# EAGLE board RaspPi_PCB (EAGLE 7.6.0)
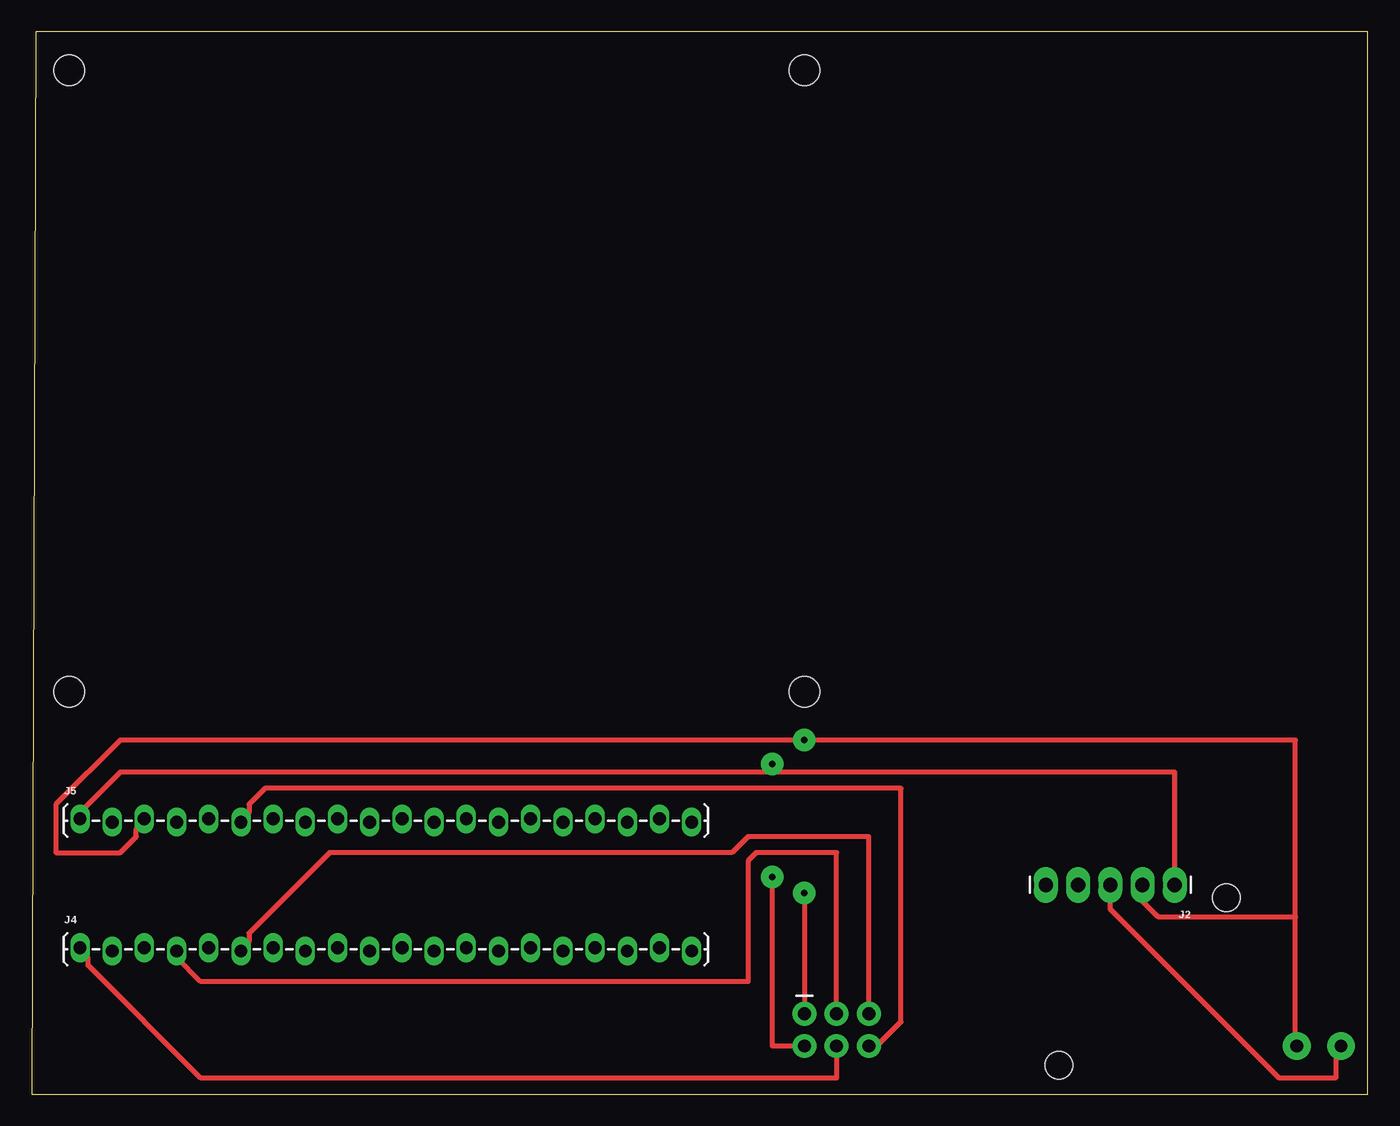
[diagram p0: board, top side]
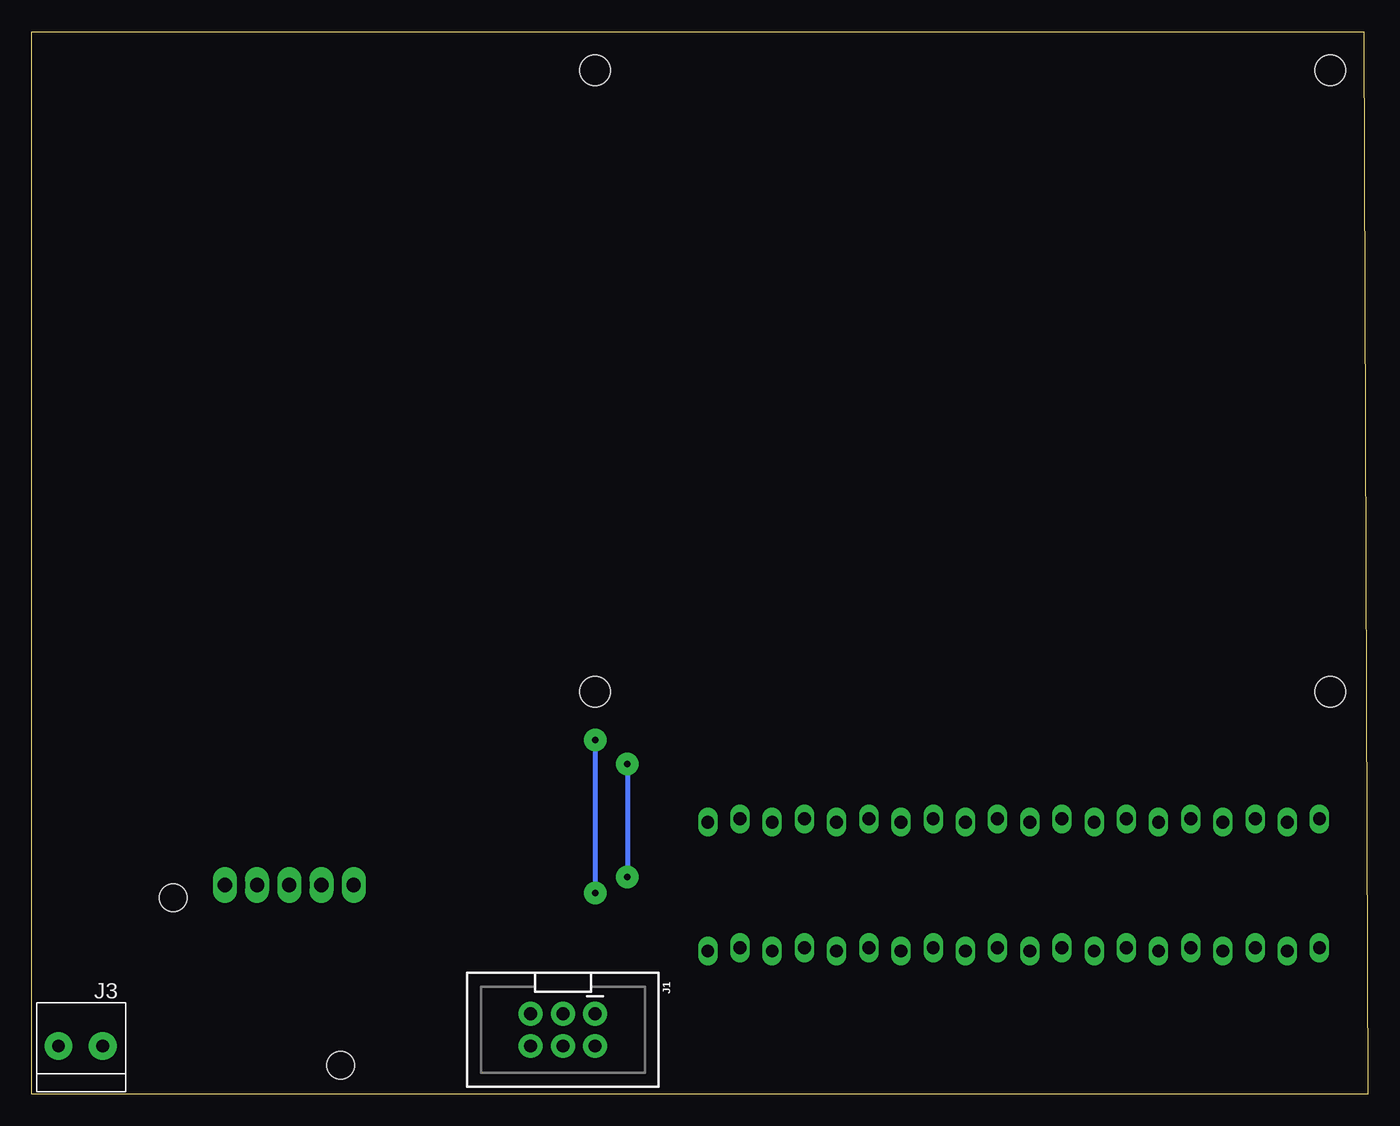
[diagram p1: board, bottom side, seen from below]

Size 105.41 x 83.8 mm. Coordinates in mm from the lower left corner, seen from the top.
Outline: 105.41,83.8 0.33,83.8 0,0 105.41,0 105.41,83.8
Copper layers (1*16): Top 0.035mm / dielectric 1.5mm / Bottom 0.035mm
Design rules "OthermillDRC_1_64_v2 *": minimum track width 16mil, minimum drill 20mil, track to track 32mil, track to pad 32mil, pad to pad 32mil, via to via 32mil, smd to smd 0mil, copper to edge 0mil, drill to drill 1mil, minimum pad ring 0mil, minimum via ring 25mil, stop-mask expansion 1mil, vias tented up to drill 30mil, thermal gap 10mil
Holes 2.44 mm at 60.96,31.75 60.96,80.75 2.96,80.75 2.96,31.75
Holes 2.18 mm at 94.23,15.49 81.03,2.29
bRestrict: area 99.1,2.5 to 104.1,5.1; area 59.7,2.5 to 67.3,7.6; area 2.5,10.2 to 53.3,12.7; area 2.5,20.3 to 53.3,22.9; area 78.7,15.2 to 91.4,17.8
vRestrict: area 55.9,0 to 72.4,10.2

## Footprints (pad centres in the part's own frame; a part is rotated, then mirrored left to right if it is on the bottom)
2X3-SHROUDED = drill 1.016 pad 1.88: 1 -1.27,2.54; 2 1.27,2.54; 3 -1.27,0; 4 1.27,0; 5 -1.27,-2.54; 6 1.27,-2.54
1X05_LONGPADS = drill 1.118 pad 1.88 long: 1 0,0; 2 2.54,0; 3 5.08,0; 4 7.62,0; 5 10.16,0
1X2-3.5MM = drill 1 pad 2.184: 1 1.8,0; 2 -1.7,0
1X20_LOCK_LONGPADS = drill 1.016 long: 1 0,0.127; 2 2.54,-0.127; 3 5.08,0.127; 4 7.62,-0.127; 5 10.16,0.127; 6 12.7,-0.127; 7 15.24,0.127; 8 17.78,-0.127; 9 20.32,0.127; 10 22.86,-0.127; 11 25.4,0.127; 12 27.94,-0.127; 13 30.48,0.127; 14 33.02,-0.127; 15 35.56,0.127; 16 38.1,-0.127; 17 40.64,0.127; 18 43.18,-0.127; 19 45.72,0.127; 20 48.26,-0.127

## Placement (x,y rotation side)
J1  [2X3-SHROUDED]  63.5,5.08 270 bottom
J2  [1X05_LONGPADS]  90.17,16.51 180 top
J3  1X2-3.5MM  [1X2-3.5MM]  101.6,3.81 0 bottom
J4  [1X20_LOCK_LONGPADS]  3.81,11.43 0 top
J5  [1X20_LOCK_LONGPADS]  3.81,21.59 0 top

## Library data of the parts
J1 = SparkFun-Connectors; PROD_ID: CONN-10681; SF_ID: PRT_10877
J2 J4 J5 = SparkFun-Connectors
J3 = adafruit

## Nets
3.3V: J1.4 J4.1
5V: J1.2 J2.1 J5.1
GND: J1.1 J2.2 J3.1 J5.3
PIN4: J1.3 J4.4
PIN17: J1.5 J4.6
PIN18: J1.6 J5.6
VIN: J2.3 J3.2

## Tracks (layer width: path | path; a pad name or v marks a point on that pad's centre or on a via)
3.3V
  Top 0.406: J1.4 63.5,1.27 13.34,1.27 4.45,10.16 4.45,10.79 3.81,11.43 J4.1
5V  (via drill 0.51)
  Top 0.406: 58.42,25.4 90.17,25.4 J2.1 | 58.42,25.4 6.99,25.4 3.81,22.23 J5.1 | J1.2 58.42,3.81 v58.42,17.14 | 58.42,25.4 v58.42,26.04
  Bottom 0.406: v58.42,26.04 v58.42,17.14
GND  (via drill 0.51)
  Top 0.406: 99.69,13.97 99.69,3.81 J3.1 | 99.69,13.97 99.69,27.94 v60.96,27.94 6.99,27.94 1.91,22.86 1.91,19.05 6.99,19.05 8.26,20.32 8.26,20.95 8.89,21.59 J5.3 | v60.96,15.88 J1.1 | J2.2 87.63,15.24 88.9,13.97 99.69,13.97
  Bottom 0.406: v60.96,27.94 v60.96,15.88
PIN4
  Top 0.406: J1.3 63.5,19.05 57.15,19.05 56.52,18.41 56.52,8.89 13.34,8.89 11.43,10.79 J4.4
PIN17
  Top 0.406: J1.5 66.04,20.32 56.52,20.32 55.24,19.05 23.5,19.05 17.14,12.7 17.14,12.06 16.51,11.43 J4.6
PIN18
  Top 0.406: J1.6 66.67,3.81 68.58,5.71 68.58,24.13 18.41,24.13 17.14,22.86 17.14,22.23 16.51,21.59 J5.6
VIN
  Top 0.406: J2.3 85.09,14.61 98.42,1.27 102.87,1.27 102.87,3.81 J3.2